# Altium PCB BSPD.PcbDoc
Units mil, origin at the board's own origin, x right, y up, seen from the top; angles counter-clockwise.
Board outline 3937.01 x 3149.61 mil, 2 copper layers (Top, Bottom); 40 components, 50 nets, 205 pads, 88 vias.
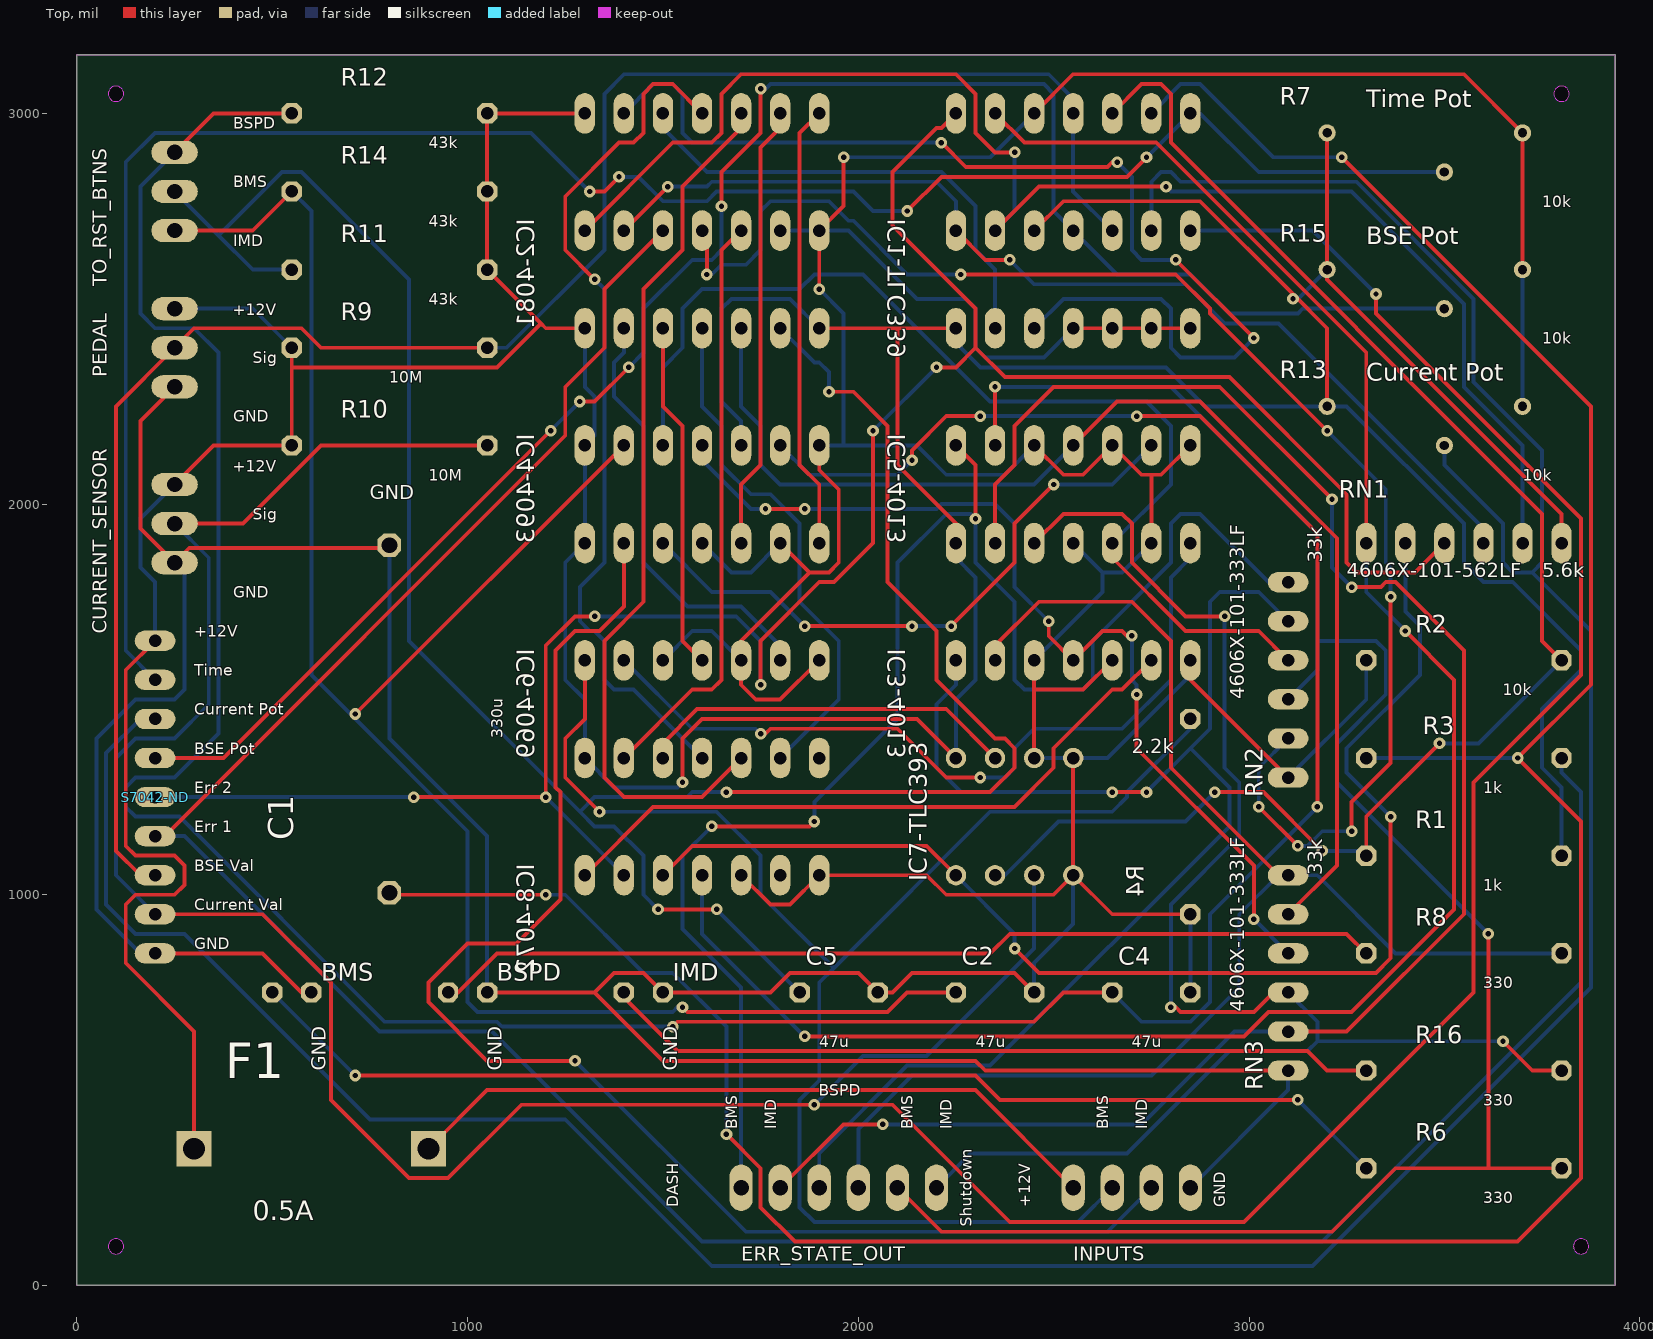
[diagram p0: Top view]
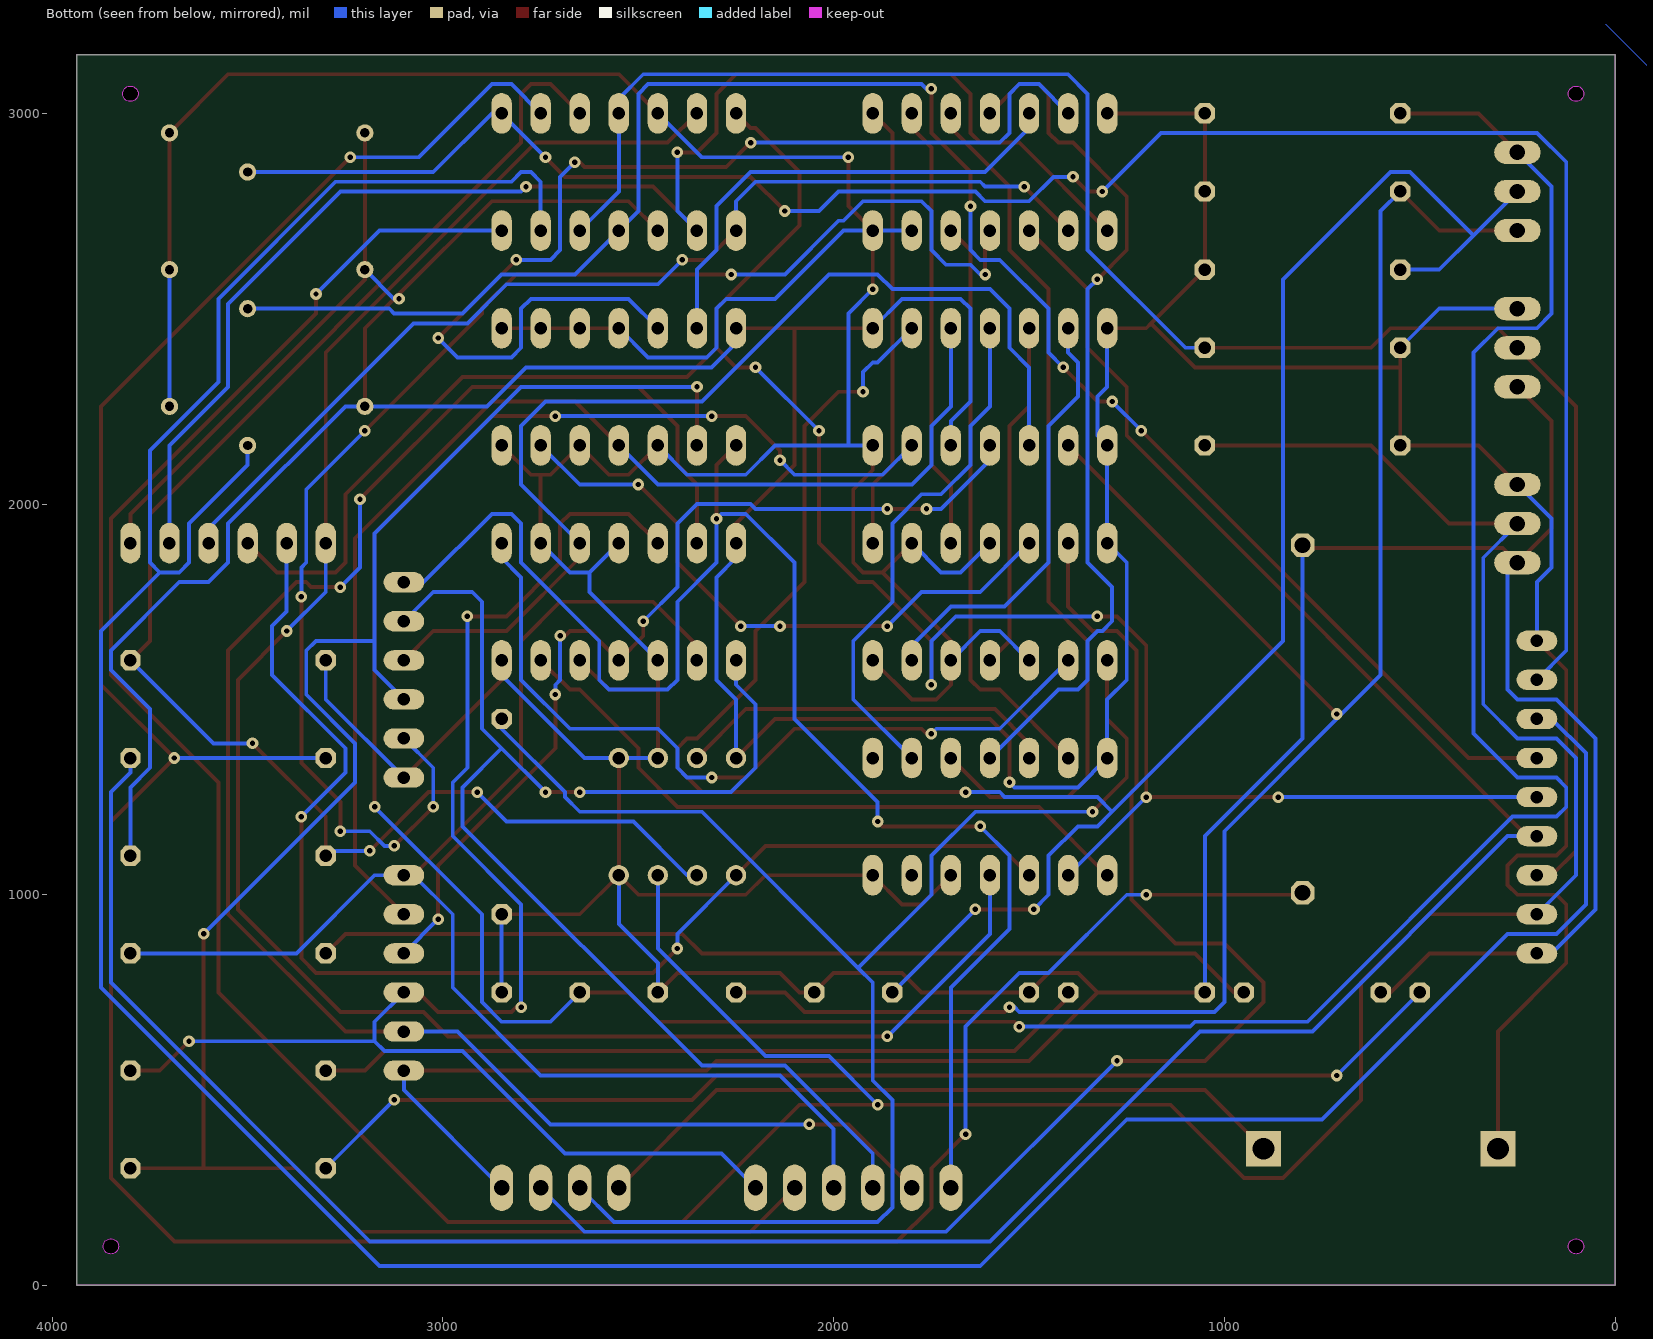
[diagram p1: Bottom view, seen from below]

## Layer stack, top to bottom
Top Solder: solder mask 0.4, Solder Resist, Dk 3.5
Top: signal copper 1.378
Dielectric 1: dielectric 12.6, FR-4, Dk 4.8
Bottom: signal copper 1.378
Bottom Solder: solder mask 0.4, Solder Resist, Dk 3.5

## Board outline
0,3149.61 0,0 3937.01,0 3937.01,3149.61
cut-out: 3850,80.31 ccw(c3850,100) 3869.68,100 ccw(c3850,100) 3850,119.69 ccw(c3850,100) 3830.32,100 ccw(c3850,100)
cut-out: 3800,3030.32 ccw(c3800,3050) 3819.68,3050 ccw(c3800,3050) 3800,3069.68 ccw(c3800,3050) 3780.32,3050 ccw(c3800,3050)
cut-out: 100,3030.32 ccw(c100,3050) 119.69,3050 ccw(c100,3050) 100,3069.68 ccw(c100,3050) 80.31,3050 ccw(c100,3050)
cut-out: 100,80.31 ccw(c100,100) 119.69,100 ccw(c100,100) 100,119.69 ccw(c100,100) 80.31,100 ccw(c100,100)

## Design rules (kind name [scope] priority, off if disabled: settings)
BoardOutlineClearance mdCopperDimension [All] p1: gap=10 ignorepadtopadclearanceinfootprint=FALSE except(0: Arc-SplitContinuation Track-SplitContinuation SMDPad-SplitContinuation THPad-SplitContinuation Via-SplitContinuation Fill-SplitContinuation Poly-SplitContinuation Region-SplitContinuation Text-SplitContinuation; 40: Poly-OutlineEdge Poly-CavityEdge Poly-CutoutEdge Poly-SplitBarrior)
Clearance "Clearance (Same Net)" [All] p1: gap=15 ignorepadtopadclearanceinfootprint=FALSE
Clearance [All] p2: gap=15 ignorepadtopadclearanceinfootprint=FALSE
HoleSize [All] p1: absolutevalues=TRUE maxlimit=100000 minlimit=13.78 maxpercent=80.000 minpercent=20.000
HoleToHoleClearance mdDrill [All] p1: gap=6 allowstackedmicrovias=TRUE
MinimumSolderMaskSliver [All] p1 off: minsoldermaskwidth=10
PasteMaskExpansion mlMinCreamFrame [All] p1: expansion=0
PolygonConnect PolygonConnect_For_PolygonThermal_ON_Width60000_Gap100000 [InPolygonClass('PolygonThermal_ON_Width60000_Gap100000') vs Not IsVia] p1: connectstyle=Relief reliefconductorwidth=6 reliefentries=4 polygonreliefangle="90 Angle" airgapwidth=10
PolygonConnect ThermalVias [IsVia] p2: connectstyle=Direct reliefconductorwidth=10 reliefentries=4 polygonreliefangle="90 Angle" airgapwidth=10
PolygonConnect [All] p3: connectstyle=Relief reliefconductorwidth=10 reliefentries=4 polygonreliefangle="90 Angle" airgapwidth=10
RoutingVias [All] p1: holewidth=13.78 width=29.78 viastyle="Through Hole" minholewidth=13.78 minwidth=29.78 maxholewidth=100 maxwidth=100
SolderMaskExpansion mlMinStopFrame [All] p1: expansion=4 istentingtop=FALSE
Width [All] p1: maxlimit=10 minlimit=10 preferedwidth=10
26 further rules are at their usual default settings.

## Classes and differential pairs
polygon class PolygonThermal_ON_Width60000_Gap100000: Polygon_1_Net_N$3 Polygon_1_Net_N$18

## Components (designator, comment, footprint, x,y, rotation, side; value= is the part's Value field where it differs from the comment)
BMS "LED3" LED3MM 550,750 r0 top
BSPD "LED2" LED3MM 1000,750 r0 top
C1 "330u" C225-108X268 800,1450 r90 top
C2 "47uF" C050-024X044 2350,750 r0 top
C4 "47uF" C050-024X044 2750,750 r0 top
C5 "47uF" C050-024X044 1950,750 r0 top
CURRENT_SENSOR "22-23-2031" 22-23-2031 250,1950 r270 top
ERR_STATE_OUT "22-23-2061" 22-23-2061 1950,250 r0 top
F1 "FUSEBLANK_5X20MM" FUSE_HOLDER_5X20MM 300,350 r0 top
IC1-TLC339 "TLC339P" DIL14 2550,2850 r0 top
IC2-4081 "4081N" DIL14 1600,2850 r0 top
IC3-4013 "4013N" DIL14 2550,1750 r0 top
IC4-4093 "4093N" DIL14 1600,2300 r0 top
IC5-4013 "4013N" DIL14 2550,2300 r0 top
IC6-4069 "4069N" DIL14 1600,1750 r0 top
IC7-TLC393 "TLC393P" DIL08 2400,1200 r0 top
IC8-4072 "4072N" DIL14 1600,1200 r0 top
IMD "LED4" LED3MM 1450,750 r0 top
INPUTS "22-23-2041" 22-23-2041 2700,250 r0 top
PEDAL "22-23-2031" 22-23-2031 250,2400 r270 top
R1 "1k" 0207/12 3550,1100 r0 top
R2 "10k" 0207/12 3550,1600 r0 top
R3 "1k" 0207/12 3550,1350 r180 top
R4 "2.2k" 0207/12 2850,1200 r90 top
R6 "330" 0207/12 3550,300 r0 top
R7 "10k" RTRIM3006P 3500,2900 r0 top
R8 "330" 0207/12 3550,850 r0 top
R9 "10M" 0207/12 800,2400 r0 top
R10 "10M" 0207/12 800,2150 r0 top
R11 "43k" 0207/12 800,2600 r0 top
R12 "43k" 0207/12 800,3000 r0 top
R13 "10k" RTRIM3006P 3500,2200 r0 top
R14 "43k" 0207/12 800,2800 r0 top
R15 "10k" RTRIM3006P 3500,2550 r0 top
R16 "330" 0207/12 3550,550 r0 top
RN1 "5.1k" SIL6 3550,1900 r180 top
RN2 "33k" SIL6 3100,1550 r90 top
RN3 "33k" SIL6 3100,800 r90 top
S7042-ND "" FE09W 200,1250 r90 top
TO_RST_BTNS "22-23-2031" 22-23-2031 250,2800 r270 top

## Footprints (in the part's own frame and the unit in brackets; to place one, negate y for a bottom-side part, rotate by r counter-clockwise, add the part's x,y. Pads: shape width x height; smd on the part's side, far side on the other; paste and mask are expansions set on the pad)
22-23-2031 [mm] "22-23-2031"
  oval 1.508x3.016 hole 1: 1(-2.54,0) 2(0,0) 3(2.54,0)
  body extent -3.3,-1.51 3.3,1.51, height 1.27
22-23-2041 [mm] "22-23-2041"
  oval 1.508x3.016 hole 1: 1(-3.81,0) 2(-1.27,0) 3(1.27,0) 4(3.81,0)
  body extent -4.57,-1.51 4.57,1.51, height 1.27
22-23-2061 [mm] "22-23-2061"
  oval 1.508x3.016 hole 1: 1(-6.35,0) 2(-3.81,0) 3(-1.27,0) 4(1.27,0) 5(3.81,0) 6(6.35,0)
  body extent -7.11,-1.51 7.11,1.51, height 1.27
0207/12 [mil] "0207/12"
  oct 52x52 / inner round 48.04 / far side oct 52x52 hole 32: 1(-250,0) 2(250,0)
  body extent -274,-24 274,24, height 150
C050-024X044 [mil] "C050-024X044"
  oct 52x52 / inner round 48.04 / far side oct 52x52 hole 32: 1(-100,0) 2(100,0)
  body extent -124,-28 124,28, height 150
C225-108X268 [mil] "C225-108X268"
  oct 60x60 / inner round 55.43 / far side oct 60x60 hole 40: 1(-445,0) 2(445,0)
  body extent -473,-28 473,28, height 50
DIL08 [mil] "DIL08"
  round 52 hole 32: 1(-150,-150) 2(-50,-150) 3(50,-150) 4(150,-150) 5(150,150) 6(50,150) 7(-50,150) 8(-150,150)
  body extent -176,-176 176,176, height 50
DIL14 [mil] "DIL14"
  oval 52x104 hole 32: 1(-300,-150) 2(-200,-150) 3(-100,-150) 4(0,-150) 5(100,-150) 6(200,-150) 7(300,-150) 8(300,150) 9(200,150) 10(100,150) 11(0,150) 12(-100,150) 13(-200,150) 14(-300,150)
  body extent -326,-202 326,202, height 50
FE09W [mil] "FE09W"
  oval 52x104 hole 32: 1(-400,0) 2(-300,0) 3(-200,0) 4(-100,0) 5(0,0) 6(100,0) 7(200,0) 8(300,0) 9(400,0)
  body extent -426,-52 426,52, height 150
FUSE_HOLDER_5X20MM [mil] "FUSE_HOLDER_5X20MM"
  rect 90x90 / inner round 83.15 / far side rect 90x90 hole 56: 1(0,0) 2(600,0)
  body extent -42,-42 642,42, height 50
LED3MM [mil] "LED3MM"
  oct 52x52 / inner round 48.04 / far side oct 52x52 hole 32: A(-50,0) K(50,0)
  body extent -85,-55 74,55, height 150
RTRIM3006P [mil] "RTRIM3006P"
  round 44 hole 24: 1(-300,50) 2(0,-50) 3(200,50)
  body extent -322,-72 222,72, height 50
SIL6 [mil] "SIL6"
  oval 52x104 hole 32: 1(-250,0) 2(-150,0) 3(-50,0) 4(50,0) 5(150,0) 6(250,0)
  body extent -283,-52 276,52, height 150

## Part data
BMS BSPD IMD: library part LED3MM, PackageName=LED3MM
C1: library part C225-108X268, PackageName=C225-108X268
C2 C4 C5: library part C050-024X044, PackageName=C050-024X044
F1: library part FUSE_HOLDER_5X20MM, PackageName=FUSE_HOLDER_5X20MM
IC1-TLC339 IC2-4081 IC3-4013 IC4-4093 IC5-4013 IC6-4069 IC8-4072: library part DIL14, PackageName=DIL14
IC7-TLC393: library part DIL08, PackageName=DIL08
R1 R2 R3 R4 R6 R8 R9 R10 R11 R12 R14 R16: library part 0207/12, PackageName=0207/12
R7 R13 R15: library part RTRIM3006P, PackageName=RTRIM3006P
RN1 RN2 RN3: library part SIL6, PackageName=SIL6
S7042-ND: library part FE09W, PackageName=FE09W
CURRENT_SENSOR PEDAL TO_RST_BTNS: PackageName=22-23-2031
ERR_STATE_OUT: PackageName=22-23-2061
INPUTS: PackageName=22-23-2041

## Free pads (board coordinates)
  round 39.37 hole 39.37 unplated: MH1(100,3050) MH2(100,100) MH3(3850,100) MH4(3800,3050)

## Via types
v1: diameter 29.78/29.78 (per signal layer), hole 13.78, Top to Bottom, 88 vias

## Nets (pads, with @x,y where several pads share a name; then routed paths per layer and width w, separated by ;. In a path a pad name is that pad's centre, name@x,y a point inside that pad or via, vN(x,y) a via of type N, cw(c..) or ccw(c..) an arc to the next point about the centre after c; other vN are vias at no path point)
+12V: CURRENT_SENSOR.1 F1.1 IC1-TLC339.3 IC2-4081.14 IC3-4013.14 IC4-4093.1 IC4-4093.5 IC4-4093.8 IC4-4093.14 IC5-4013.14 IC6-4069.14 IC7-TLC393.8 IC8-4072.14 PEDAL.1 R1.2 R7.1 R9.1 R10.1 R11.2 R12.2 R13.1 R14.2 R15.1 RN1.1 S7042-ND.9 | length 14369.2
  Top w10: S7042-ND.9 125,1575 125,1125 150,1100 250,1100 275,1075 275,1025 250,1000 150,1000 125,975 125,825 300,650 F1.1 ; CURRENT_SENSOR.1 350,2150 R10.1 550,2350 ; R9.1 550,2350 ; IC4-4093.14 1200,2450 1187.5,2462.5 ; IC2-4081.14 R12.2 R14.2 R11.2 1187.5,2462.5 ; v1(1550,1287.5) 1550,1400 1600,1450 2150,1450 IC7-TLC393.8 ; IC4-4093.8 2100,2450 ; IC3-4013.14 2250,1950 2100,2100 2100,2450 ; IC5-4013.14 2100,2450 ; IC1-TLC339.3 2525,2775 2875,2775 v1@3112.5,2537.5 ; v1(3112.5,2525) v1@3112.5,2537.5 ; R13.1 3200,2450 v1@3112.5,2537.5 ; R7.1 R15.1 3200,2575 3800,1975 RN1.1 ; 550,2350 1075,2350 1187.5,2462.5
  Bottom w10: S7042-ND.9 200,1800 162.5,1837.5 162.5,1962.5 CURRENT_SENSOR.1 ; PEDAL.1 450,2500 R9.1 ; IC4-4093.14 1300,2300 1325,2275 1325,2175 IC4-4093.1 IC6-4069.14 1250,1850 1250,1550 1300,1500 IC8-4072.14 1375,1275 1537.5,1275 v1(1550,1287.5) ; IC4-4093.5 1700,2212.5 1650,2262.5 1650,2500 1675,2525 1825,2525 IC4-4093.8 ; IC7-TLC393.8 2250,1500 2300,1550 2300,1812.5 2250,1862.5 IC3-4013.14 ; IC5-4013.14 2250,2412.5 2312.5,2350 2787.5,2350 2887.5,2250 R13.1 3250,2250 3550,1950 3550,1850 3600,1800 3675,1800 3850,1625 3850,1575 3750,1475 3750,1325 3800,1275 R1.2 ; v1(3112.5,2525) 3125,2525 R15.1
BMS: IC6-4069.13 INPUTS.3 | length 3642.2
  Top w10: v1(1275,575) 1050,575 900,725 900,775 1000,875 1125,875 1237.5,987.5 1237.5,1262.5 1225,1275 1225,1625 1275,1675 1337.5,1675 1400,1737.5 IC6-4069.13
  Bottom w10: v1(1275,575) 1712.5,137.5 2637.5,137.5 INPUTS.3
BMS_DASH: ERR_STATE_OUT.1 IC5-4013.1 RN2.6 | length 4041.9
  Top w10: v1(1625,1175) 1875,1175 v1(1887.5,1187.5) ; IC5-4013.1 2300,2100 v1(2300,1962.5)
  Bottom w10: v1(1625,1175) 1550,1100 1550,912.5 1700,762.5 ERR_STATE_OUT.1 ; v1(1887.5,1187.5) 1887.5,1237.5 2100,1450 2100,1850 2225,1975 2287.5,1975 v1(2300,1962.5) 2300,1850 2400,1750 2400,1550 2425,1525 2575,1525 2600,1550 2600,1650 2800,1850 2800,1950 2825,1975 2875,1975 3050,1800 RN2.6
BMS_ERR: ERR_STATE_OUT.5 IC5-4013.2 R6.2 RN2.3 | length 5122.9
  Top w10: ERR_STATE_OUT.5 2212.5,137.5 3212.5,137.5 3375,300 3612.5,300 ; IC5-4013.2 v1(2350,2300) ; v1(3612.5,900) 3612.5,300 ; R6.2 3612.5,300
  Bottom w10: v1(2350,2300) 2800,2300 3175,1925 3175,1650 ; RN2.3 3175,1575 3175,1650 ; v1(3612.5,900) 3225,1287.5 3225,1387.5 3350,1512.5 3350,1625 3325,1650 3175,1650
BMS_RST: IC4-4093.10 IC5-4013.4 RN3.5 | length 3113.7
  Top w10: IC5-4013.4 2662.5,2262.5 2875,2262.5 3225,1912.5 3225,1075 RN3.5
  Bottom w10: IC4-4093.10 1700,2250 1750,2200 1750,2100 1800,2050 2450,2050 IC5-4013.4
BSE: IC1-TLC339.5 IC1-TLC339.11 PEDAL.2 R9.2 S7042-ND.3 | length 4746
  Top w10: S7042-ND.3 162.5,1050 100,1112.5 100,2250 PEDAL.2 300,2450 575,2450 625,2400 R9.2
  Bottom w10: R9.2 1100,2400 1350,2650 1350,3050 1400,3100 2487.5,3100 2550,3037.5 IC1-TLC339.11 2550,2800 IC1-TLC339.5
BSE_POT: IC1-TLC339.4 R15.2 S7042-ND.6 | length 4687.7
  Top w10: S7042-ND.6 375,1350 v1(1212.5,2187.5) ; v1(1287.5,2262.5) 1325,2262.5 v1(1412.5,2350) ; v1(1650,2762.5) 1650,2850 1750,2950 v1(1750,3062.5)
  Bottom w10: v1(1212.5,2187.5) v1(1287.5,2262.5) ; v1(1412.5,2350) 1450,2387.5 1450,2500 1575,2625 1625,2625 1650,2650 v1(1650,2762.5) ; v1(1750,3062.5) 1762.5,3062.5 1775,3075 2475,3075 2500,3050 2500,2750 IC1-TLC339.4 2662.5,2587.5 2850,2587.5 2950,2487.5 3125,2487.5 3137.5,2500 R15.2
BSE_UNPLUGGED: IC1-TLC339.13 IC8-4072.4 RN1.6 | length 5040.3
  Top w10: v1(1862.5,637.5) 2987.5,637.5 3050,700 3262.5,700 3525,962.5 3525,1550 v1(3400,1675) ; IC1-TLC339.13 2425,2925 2762.5,2925 3300,2387.5 RN1.6
  Bottom w10: IC8-4072.4 1600,900 v1(1862.5,637.5) ; RN1.6 3300,1775 v1(3400,1675)
BSPD_DASH: ERR_STATE_OUT.3 IC3-4013.1 RN2.5 | length 3381.2
  Top w10: v1(2650,1262.5) v1(2737.5,1262.5)
  Bottom w10: ERR_STATE_OUT.3 1900,337.5 2125,562.5 2337.5,562.5 2950,1175 2950,1275 2850,1375 ; IC3-4013.1 2250,1537.5 2200,1487.5 2200,1325 2262.5,1262.5 v1(2650,1262.5) ; v1(2737.5,1262.5) 2850,1375 ; RN2.5 3025,1775 2925,1775 2900,1750 2900,1425 2850,1375
BSPD_ERR: ERR_STATE_OUT.4 IC3-4013.2 R8.2 RN3.6 | length 3726.3
  Top w10: IC3-4013.2 2350,1637.5 2462.5,1750 2700,1750 2800,1650 2800,1325 3075,1050 RN3.6
  Bottom w10: ERR_STATE_OUT.4 2000,400 2137.5,537.5 2750,537.5 2975,762.5 2975,950 3075,1050 RN3.6 3175,1050 3375,850 R8.2
BSPD_RST: IC3-4013.4 IC4-4093.4 RN3.4 | length 2491.7
  Top w10: v1(1762.5,1987.5) v1(1862.5,1987.5) ; v1(2487.5,1700) 2487.5,1662.5 IC3-4013.4 2625,1675 2675,1675 2687.5,1662.5 v1(2700,1662.5) ; v1(2712.5,1512.5) 2712.5,1375 3012.5,1075 v1(3012.5,937.5)
  Bottom w10: IC4-4093.4 1600,2112.5 1725,1987.5 v1(1762.5,1987.5) ; v1(1862.5,1987.5) 2200,1987.5 2212.5,2000 2350,2000 2400,1950 2400,1787.5 v1(2487.5,1700) ; v1(2700,1662.5) 2700,1550 2712.5,1537.5 v1(2712.5,1512.5) ; v1(3012.5,937.5) RN3.4
CURR_UNPLUGGED: IC7-TLC393.1 IC8-4072.3 RN1.5 | length 3268
  Top w10: IC8-4072.3 1575,1125 2175,1125 IC7-TLC393.1 ; v1(2400,862.5) 2462.5,800 3325,800 3362.5,837.5 v1(3362.5,1200)
  Bottom w10: IC7-TLC393.1 2400,900 v1(2400,862.5) ; v1(3362.5,1200) 3250,1312.5 3250,1375 3437.5,1562.5 3437.5,1687.5 3400,1725 RN1.5
CURRENT_POT: IC1-TLC339.6 R13.2 S7042-ND.7 | length 8477
  Bottom w10: S7042-ND.7 162.5,1450 75,1362.5 75,975 150,900 275,900 750,425 1250,425 1625,50 3162.5,50 3875,762.5 3875,1675 3725,1825 ; IC1-TLC339.6 2750,2825 2775,2850 2800,2850 2825,2825 3275,2825 3575,2525 3575,2312.5 3750,2137.5 3750,1850 3725,1825 ; R13.2 3500,2100 3650,1950 3650,1850 3675,1825 3725,1825
CURRENT_SENSOR: CURRENT_SENSOR.2 IC1-TLC339.7 IC7-TLC393.3 R10.2 S7042-ND.2 | length 9969.9
  Top w10: S7042-ND.2 475,950 650,775 650,475 850,275 950,275 1137.5,462.5 v1(1887.5,462.5) 2087.5,462.5 2387.5,162.5 2987.5,162.5 3575,750 3575,1287.5 3850,1562.5 3850,1962.5 3325,2487.5 v1(3325,2537.5) ; CURRENT_SENSOR.2 425,1950 625,2150 R10.2
  Bottom w10: S7042-ND.2 100,1050 100,1350 150,1400 250,1400 337.5,1487.5 337.5,1862.5 CURRENT_SENSOR.2 ; v1(1887.5,462.5) 2012.5,587.5 2175,587.5 2450,862.5 IC7-TLC393.3 ; IC1-TLC339.7 3162.5,2700 v1(3325,2537.5)
ERROR_1: IC2-4081.3 R3.1 S7042-ND.4 | length 7053
  Top w10: S7042-ND.4 225,1150 1250,2175 1250,2300 1350,2400 1350,2550 IC2-4081.3
  Bottom w10: S7042-ND.4 275,1150 775,650 1062.5,650 1600,112.5 3187.5,112.5 3850,775 3850,1262.5 3800,1312.5 R3.1
ERROR_2: IC1-TLC339.14 IC8-4072.2 RN1.4 S7042-ND.5 | length 5865.8
  Top w10: v1(862.5,1250) v1(1200,1250) 1200,1637.5 1275,1712.5 v1(1325,1712.5) ; v1(1750,1537.5) 1750,1650 1900,1800 1937.5,1800 2037.5,1900 v1(2037.5,2187.5) ; v1(2200,2350) 2250,2350 2300,2400 ; IC1-TLC339.14 2212.5,2962.5 2200,2962.5 2087.5,2850 2087.5,2712.5 2300,2500 2300,2400 ; RN1.4 3425,1825 3275,1825 3250,1850 3250,2025 2950,2325 2375,2325 2300,2400
  Bottom w10: S7042-ND.5 v1(862.5,1250) ; v1(1200,1250) IC8-4072.2 ; v1(1325,1712.5) 1687.5,1712.5 1750,1650 v1(1750,1537.5) ; v1(2037.5,2187.5) v1(2200,2350)
ERROR_3: IC3-4013.6 IC8-4072.1 | length 1707.1
  Top w10: IC8-4072.1 1475,1225 2400,1225 2500,1325 2500,1375 2650,1525 2675,1525 IC3-4013.6
ESO_BMS_RST: C5.1 IC4-4093.9 R11.1 TO_RST_BTNS.2 | length 5999.1
  Top w10: v1(1487.5,962.5) v1(1637.5,962.5) ; v1(1662.5,1262.5) 2337.5,1262.5 2400,1325 2400,1375 2375,1400 2350,1400 2200,1550 2200,1675 2075,1800 2075,2200 1987.5,2287.5 v1(1925,2287.5)
  Bottom w10: TO_RST_BTNS.2 362.5,2687.5 ; R11.1 450,2600 362.5,2687.5 ; v1(1487.5,962.5) 1450,1000 1450,1100 1375,1175 1325,1175 1287.5,1212.5 ; v1(1637.5,962.5) C5.1 ; v1(1662.5,1262.5) 1575,1262.5 1562.5,1250 1325,1250 1287.5,1212.5 ; IC4-4093.9 1887.5,2362.5 1900,2362.5 1925,2337.5 v1(1925,2287.5) ; 362.5,2687.5 525,2850 575,2850 850,2575 850,1650 1287.5,1212.5
ESO_BSPD_RST: C4.1 IC4-4093.6 R12.1 TO_RST_BTNS.1 | length 8368.1
  Top w10: TO_RST_BTNS.1 350,3000 R12.1 ; v1(1525,662.5) 1537.5,675 2450,675 2525,750 C4.1 ; v1(2137.5,2112.5) 2137.5,2137.5 2225,2225 v1(2312.5,2225) ; v1(2712.5,2225) 2875,2225 3175,1925 v1(3175,1225)
  Bottom w10: TO_RST_BTNS.1 162.5,2812.5 162.5,2487.5 200,2450 300,2450 362.5,2387.5 362.5,1412.5 250,1300 150,1300 125,1275 125,1225 150,1200 262.5,1200 787.5,675 1075,675 1087.5,662.5 v1(1525,662.5) ; IC4-4093.6 1875,2075 2100,2075 v1(2137.5,2112.5) ; v1(2312.5,2225) v1(2712.5,2225) ; C4.1 2725,675 2850,675 2900,725 2900,950 v1(3175,1225)
ESO_IMD_RST: C2.1 IC4-4093.2 R14.1 TO_RST_BTNS.3 | length 4879
  Top w10: TO_RST_BTNS.3 450,2700 R14.1 ; v1(712.5,1462.5) IC4-4093.2 ; v1(1550,712.5) 1562.5,700 2075,700 2125,750 C2.1
  Bottom w10: R14.1 600,2750 600,1562.5 v1@700,1462.5 ; v1(712.5,1462.5) v1@700,1462.5 ; v1(1550,712.5) 1537.5,712.5 1525,700 1025,700 1000,725 1000,1162.5 v1@700,1462.5
GND: BMS.K BSPD.K C1.2 C2.2 C4.2 C5.2 CURRENT_SENSOR.3 IC1-TLC339.12 IC2-4081.6 IC2-4081.7 IC3-4013.3 IC3-4013.5 IC3-4013.7 IC3-4013.9 IC3-4013.11 IC4-4093.7 IC5-4013.3 IC5-4013.5 IC5-4013.7 IC5-4013.8 IC5-4013.9 IC5-4013.10 IC5-4013.11 IC6-4069.3 IC6-4069.5 IC6-4069.7 IC6-4069.9 IC6-4069.11 IC7-TLC393.4 IC7-TLC393.5 IC7-TLC393.6 IC8-4072.5 IC8-4072.7 IMD.K INPUTS.4 PEDAL.3 R2.1 R4.1 R7.3 R13.3 R15.3 RN2.1 RN3.1 S7042-ND.1 | length 19922.3
  Top w10: S7042-ND.1 475,850 575,750 BMS.K ; PEDAL.3 162.5,2212.5 162.5,1937.5 CURRENT_SENSOR.3 287.5,1887.5 800,1887.5 C1.2 ; BSPD.K 1325,750 ; IC8-4072.5 1775,975 1825,975 IC8-4072.7 2175,1050 2225,1000 2500,1000 IC7-TLC393.4 ; IC6-4069.9 1875,1825 ; IC6-4069.7 1800,1500 1737.5,1500 1700,1537.5 IC6-4069.5 1700,1650 1875,1825 ; IC4-4093.7 1900,2087.5 1950,2037.5 1950,1850 1925,1825 1875,1825 ; v1(1900,2550) IC2-4081.7 1962.5,2762.5 v1(1962.5,2887.5) ; C2.2 2400,800 2137.5,800 2087.5,750 C5.2 2000,800 1825,800 1775,750 IMD.K 1450,800 1375,800 1325,750 ; IC7-TLC393.6 2450,1525 ; IC3-4013.3 2450,1525 ; IC5-4013.3 2525,2075 2575,2075 IC5-4013.5 2725,2075 2750,2075 ; IC1-TLC339.12 2550,3100 3550,3100 R7.3 R15.3 ; IC7-TLC393.5 IC7-TLC393.4 ; IC5-4013.11 IC5-4013.10 IC5-4013.9 IC5-4013.8 ; IC3-4013.5 2575,1525 2450,1525 ; IC3-4013.9 2750,2075 ; R4.1 2650,950 IC7-TLC393.4 ; IC3-4013.7 2850,1550 RN2.1 ; IC5-4013.7 2775,2075 2750,2075 ; RN3.1 2325,550 2300,575 1500,575 1325,750
  Bottom w10: S7042-ND.1 162.5,850 50,962.5 50,1400 150,1500 250,1500 275,1525 275,1825 CURRENT_SENSOR.3 ; C1.2 800,1400 1050,1150 BSPD.K ; IC6-4069.3 1575,1675 1625,1675 IC6-4069.5 ; IC6-4069.11 1675,1825 1725,1825 IC6-4069.9 ; IC2-4081.6 IC2-4081.7 1975,2700 2150,2525 2275,2525 2300,2500 2300,2400 2325,2375 2475,2375 IC5-4013.11 ; IC4-4093.7 1962.5,2150 ; v1(1900,2550) 1962.5,2487.5 1962.5,2150 ; v1(1962.5,2887.5) 2337.5,2887.5 IC1-TLC339.12 ; C2.2 2450,825 2550,925 IC7-TLC393.4 ; IC7-TLC393.6 IC7-TLC393.5 2637.5,1350 2850,1562.5 IC3-4013.7 ; IC3-4013.3 2625,1775 2625,1825 ; IC5-4013.3 2375,2075 2225,2075 2150,2150 1962.5,2150 ; IC3-4013.11 2625,1825 ; IC3-4013.9 2675,1825 2625,1825 ; INPUTS.4 3100,500 RN3.1 ; C4.2 R4.1 ; RN2.1 3300,1500 R2.1 ; R13.3 R15.3
IMD: IC6-4069.1 INPUTS.2 R4.2 | length 3967.8
  Top w10: IC6-4069.1 1300,1450 1250,1400 1250,1300 v1(1337.5,1212.5)
  Bottom w10: v1(1337.5,1212.5) 1637.5,1212.5 1750,1100 1750,1000 1937.5,812.5 ; INPUTS.2 2562.5,162.5 1887.5,162.5 1850,200 1850,475 1900,525 1900,775 1937.5,812.5 ; R4.2 2850,1425 2687.5,1262.5 2687.5,1250 2650,1212.5 2337.5,1212.5 1937.5,812.5
IMD_DASH: ERR_STATE_OUT.2 IC3-4013.13 RN3.2 | length 4619.5
  Top w10: ERR_STATE_OUT.2 1962.5,412.5 v1(2062.5,412.5) ; IC3-4013.13 2350,2050 2400,2100 2400,2200 2500,2300 2925,2300 v1(3212.5,2012.5) ; RN3.2 3250,650 3550,950 3550,1625 3375,1800 3350,1800 3337.5,1787.5 v1(3262.5,1787.5)
  Bottom w10: v1(2062.5,412.5) 2725,412.5 2962.5,650 RN3.2 ; v1(3212.5,2012.5) 3212.5,1837.5 v1(3262.5,1787.5)
IMD_ERR: ERR_STATE_OUT.6 IC3-4013.12 R16.2 RN3.3 | length 4042.2
  Top w10: IC3-4013.12 2525,1975 2675,1975 2700,1950 2700,1850 2837.5,1712.5 v1(2937.5,1712.5) ; v1(2800,712.5) 2812.5,712.5 2825,700 3012.5,700 3062.5,750 RN3.3 ; v1(3650,625) 3725,550 R16.2
  Bottom w10: ERR_STATE_OUT.6 2287.5,337.5 2687.5,337.5 2950,600 3150,600 3175,625 ; v1(2800,712.5) 2800,975 2975,1150 2975,1287.5 2937.5,1325 v1(2937.5,1712.5) ; RN3.3 3175,675 3175,625 ; v1(3650,625) 3175,625
IMD_RST: IC3-4013.10 IC4-4093.3 RN2.4 | length 2775.8
  Top w10: IC3-4013.10 2650,1862.5 2837.5,1675 3025,1675 RN2.4
  Bottom w10: IC4-4093.3 1500,2350 1550,2400 1550,2500 1600,2550 1850,2550 1887.5,2587.5 2012.5,2587.5 2337.5,2262.5 2737.5,2262.5 2800,2200 2800,2050 IC3-4013.10
N$1: IC1-TLC339.2 IC2-4081.1 RN1.2 | length 3731.9
  Top w10: IC2-4081.1 1525,2925 1625,2925 1650,2950 1650,3050 1700,3100 2250,3100 2300,3050 2300,2950 2350,2900 v1(2400,2900) ; IC1-TLC339.2 2462.5,2812.5 v1(2787.5,2812.5)
  Bottom w10: IC1-TLC339.2 2400,2750 v1(2400,2900) ; v1(2787.5,2812.5) 2800,2800 3262.5,2800 3550,2512.5 3550,2300 3700,2150 RN1.2
N$2: IC1-TLC339.1 IC2-4081.2 RN1.3 | length 2700.8
  Top w10: IC2-4081.2 v1(1512.5,2812.5) ; IC1-TLC339.1 2325,2625 v1(2387.5,2625)
  Bottom w10: v1(1512.5,2812.5) 1612.5,2812.5 1625,2825 2200,2825 2250,2775 IC1-TLC339.1 ; v1(2387.5,2625) 2450,2562.5 2837.5,2562.5 2937.5,2462.5 3075,2462.5 3600,1937.5 RN1.3
N$3: 
N$4: F1.2 INPUTS.1 | length 1815.7
  Top w10: F1.2 1050,500 2300,500 INPUTS.1
N$5: IC3-4013.8 IC6-4069.2 | length 2038.2
  Top w10: v1(1750,1412.5) 1762.5,1412.5 1775,1425 2100,1425 2225,1300 v1(2312.5,1300)
  Bottom w10: IC6-4069.2 1575,1425 1737.5,1425 v1(1750,1412.5) ; v1(2312.5,1300) 2375,1300 2400,1325 2400,1375 2450,1425 2675,1425 2800,1550 2800,1812.5 2850,1862.5 IC3-4013.8
N$6: C1.1 IC1-TLC339.9 R3.2 | length 7714.9
  Top w10: C1.1 800,1000 v1(1200,1000) ; v1(1662.5,387.5) 1750,300 1750,200 1837.5,112.5 3687.5,112.5 3850,275 3850,1187.5 v1(3687.5,1350) 3875,1537.5 3875,2250 v1(3237.5,2887.5)
  Bottom w10: v1(1200,1000) 1250,1000 1450,800 1525,800 1662.5,662.5 v1(1662.5,387.5) ; IC1-TLC339.9 2825,3075 2875,3075 3062.5,2887.5 v1(3237.5,2887.5) ; R3.2 v1(3687.5,1350)
N$7: IC7-TLC393.7 IC8-4072.12 | length 975.5
  Top w10: IC8-4072.12 1500,1387.5 1587.5,1475 2225,1475 IC7-TLC393.7
N$8: IC4-4093.11 IC8-4072.9 | length 1336.4
  Bottom w10: IC4-4093.11 1600,2250 1650,2200 1650,2100 1725,2025 1775,2025 1850,1950 1850,1750 1950,1650 1950,1500 IC8-4072.9
N$9: BMS.A R6.1 | length 2986.4
  Top w10: v1(712.5,537.5) 2300,537.5 2362.5,475 v1(3125,475)
  Bottom w10: BMS.A v1(712.5,537.5) ; v1(3125,475) R6.1
N$10: IC4-4093.12 IC6-4069.4 | length 891.4
  Top w10: IC4-4093.12 1500,2250 1550,2200 1550,1650 IC6-4069.4
N$11: IC2-4081.10 IC8-4072.10 | length 2257.1
  Top w10: IC8-4072.10 1600,1250 1400,1250 1350,1300 1350,1650 1450,1750 1450,2550 1550,2650 1550,2812.5 1700,2962.5 IC2-4081.10
N$12: IC2-4081.11 IC8-4072.11 | length 2229.6
  Top w10: v1(1325,2575) 1250,2650 1250,2787.5 1387.5,2925 1425,2925 1450,2950 1450,3050 1475,3075 1525,3075 IC2-4081.11
  Bottom w10: v1(1325,2575) 1350,2550 1350,1850 1287.5,1787.5 1287.5,1700 1312.5,1675 1325,1675 1350,1650 1350,1550 1375,1525 1425,1525 IC8-4072.11
N$13: IC4-4093.13 IC6-4069.6 | length 1116.9
  Bottom w10: IC4-4093.13 1400,2387.5 1375,2362.5 1375,2275 1450,2200 1450,1850 1562.5,1737.5 1700,1737.5 1800,1637.5 IC6-4069.6
N$14: IC5-4013.6 IC6-4069.12 | length 1588.2
  Top w10: v1(1862.5,1687.5) v1(2137.5,1687.5) ; v1(2237.5,1687.5) 2400,1850 2400,1950 v1(2500,2050)
  Bottom w10: IC6-4069.12 1625,1775 1775,1775 v1(1862.5,1687.5) ; v1(2137.5,1687.5) v1(2237.5,1687.5) ; v1(2500,2050) 2650,2050 IC5-4013.6
N$15: IMD.A R16.1 | length 1990.2
  Top w10: IMD.A 1400,737.5 1537.5,600 3150,600 3200,550 R16.1
N$16: IC2-4081.9 IC6-4069.10 | length 1141.4
  Top w10: IC6-4069.10 1700,2050 1750,2100 1750,2912.5 1800,2962.5 IC2-4081.9
N$17: IC2-4081.8 IC6-4069.8 | length 1141.4
  Top w10: IC6-4069.8 1900,2050 1850,2100 1850,2950 IC2-4081.8
N$18: 
N$19: IC2-4081.5 IC8-4072.13 | length 1503.6
  Top w10: IC8-4072.13 1575,1525 1625,1525 1650,1550 1650,2650 IC2-4081.5
N$21: BSPD.A R8.1 | length 2432.8
  Top w10: BSPD.A 975,750 1075,850 2337.5,850 2387.5,900 3250,900 R8.1
N$22: IC2-4081.12 IC5-4013.13 | length 1253.6
  Bottom w10: IC2-4081.12 1500,2962.5 1612.5,2850 2212.5,2850 2300,2762.5 2300,2650 2350,2600 IC5-4013.13
N$23: IC2-4081.13 IC5-4013.12 | length 2826.6
  Top w10: v1(2212.5,2925) 2275,2862.5 2637.5,2862.5 2650,2875 v1(2662.5,2875) ; v1(2812.5,2625) v1(3012.5,2425)
  Bottom w10: IC2-4081.13 1475,3075 1525,3075 1550,3050 1550,2950 1575,2925 v1(2212.5,2925) ; IC5-4013.12 2525,2525 2775,2525 2800,2500 2800,2400 2825,2375 2962.5,2375 v1(3012.5,2425) ; v1(2662.5,2875) 2700,2837.5 2700,2650 2725,2625 v1(2812.5,2625)
N$24: IC2-4081.4 RN2.2 | length 3726.3
  Top w10: IC2-4081.4 1612.5,2687.5 v1(1612.5,2587.5) ; v1(2262.5,2587.5) 2812.5,2587.5 2900,2500 2900,2487.5 v1(3200,2187.5) ; v1(3025,1225) v1(3125,1125) ; v1(3262.5,1162.5) 3262.5,1237.5 3362.5,1337.5 v1(3362.5,1762.5)
  Bottom w10: v1(1612.5,2587.5) 1625,2587.5 1650,2612.5 1712.5,2612.5 1750,2650 1750,2750 1775,2775 1925,2775 1975,2725 1987.5,2725 2125,2587.5 v1(2262.5,2587.5) ; v1(3025,1225) 3025,1325 RN2.2 ; v1(3125,1125) 3150,1125 3187.5,1162.5 v1(3262.5,1162.5) ; v1(3200,2187.5) 3350,2037.5 3350,1850 3362.5,1837.5 v1(3362.5,1762.5)
TIMED_POT: IC1-TLC339.8 R7.2 S7042-ND.8 | length 5062.4
  Top w10: v1(1312.5,2800) 1350,2800 v1(1387.5,2837.5) ; v1(2125,2750) 2212.5,2837.5 2687.5,2837.5 v1(2737.5,2887.5)
  Bottom w10: S7042-ND.8 125,1625 125,2875 200,2950 1162.5,2950 v1(1312.5,2800) ; v1(1387.5,2837.5) 1437.5,2837.5 1500,2775 1612.5,2775 1637.5,2800 1987.5,2800 2037.5,2750 v1(2125,2750) ; v1(2737.5,2887.5) IC1-TLC339.8 2875,3000 3025,2850 R7.2
UNPLUG: IC1-TLC339.10 IC7-TLC393.2 R1.1 R2.2 | length 3926.7
  Top w10: IC1-TLC339.10 2725,3075 2775,3075 2800,3050 2800,2925 3750,1975 3750,1650 R2.2 ; v1(2912.5,1262.5) 3037.5,1262.5 v1(3187.5,1112.5) ; R1.1 3300,1200 v1(3487.5,1387.5)
  Bottom w10: IC7-TLC393.2 2375,1050 2512.5,1187.5 2837.5,1187.5 v1(2912.5,1262.5) ; v1(3187.5,1112.5) 3287.5,1112.5 R1.1 ; v1(3487.5,1387.5) 3587.5,1387.5 R2.2
pads on no net: IC8-4072.6 IC8-4072.8

## Polygon pours and split planes (outlines as drawn)
N$3 on Top "Polygon_1_Net_N$3" (solid, remove dead copper, pour order 0): -153,3253 -153,-51.24 -51.24,-153 3951.24,-153 4153,48.76 4153,3253
N$18 on Bottom "Polygon_1_Net_N$18" (solid, remove dead copper, pour order 1): -2.12,3202.12 -253,2951.24 -253,-1.24 -151.24,-103 4103,-103 4103,3201.24 4001.24,3303 98.76,3303

## Keep-outs
Keep-Out Layer:
  the board outline again, w0

## Silkscreen, mask and mechanical layers (free items; w line width, h text height)
Top Overlay:
  text "Time Pot" at 3300,3000 h77.5
  text "BSPD" at 400,2950 h49.6
  text "43k" at 900,2900 h49.6
  text "BMS" at 400,2800 h49.6
  text "10k" at 3750,2750 h49.6
  text "43k" at 900,2700 h49.6
  text "IMD" at 400,2650 h49.6
  text "BSE Pot" at 3300,2650 h77.5
  text "43k" at 900,2500 h49.6
  text "+12V" at 398.53,2472.58 h49.6
  text "10k" at 3750,2400 h49.6
  text "Sig" at 450,2350 h49.6
  text "10M" at 800,2300 h49.6
  text "Current Pot" at 3300,2300 h77.5
  text "GND" at 400,2200 h49.6
  text "+12V" at 398.53,2072.58 h49.6
  text "10M" at 900,2050 h49.6
  text "10k" at 3700,2050 h49.6
  text "GND" at 750,2000 h62
  text "Sig" at 450,1950 h49.6
  text "33k" at 3200,1850 h62 r90
  text "4606X-101-562LF" at 3250,1800 h62
  text "5.6k" at 3750,1800 h62
  text "GND" at 400,1750 h49.6
  text "+12V" at 300,1650 h49.6
  text "Time" at 300,1550 h49.6
  text "4606X-101-333LF" at 3000,1500 h62 r90
  text "10k" at 3650,1500 h49.6
  text "Current Pot" at 300,1450 h49.6
  text "330u" at 1100,1400 h49.6 r90
  text "BSE Pot" at 300,1350 h49.6
  text "2.2k" at 2700,1350 h62
  text "Err 2" at 300,1250 h49.6
  text "1k" at 3600,1250 h49.6
  text "Err 1" at 300,1150 h49.6
  text "BSE Val" at 300,1050 h49.6
  text "33k" at 3200,1050 h62 r90
  text "1k" at 3600,1000 h49.6
  text "Current Val" at 300,950 h49.6
  text "GND" at 300,850 h49.6
  text "330" at 3600,750 h49.6
  text "4606X-101-333LF" at 3000,700 h62 r90
  text "47u" at 1900,600 h49.6
  text "47u" at 2300,600 h49.6
  text "47u" at 2700,600 h49.6
  text "GND" at 650,550 h62 r90
  text "GND" at 1100,550 h62 r90
  text "GND" at 1550,550 h62 r90
  text "BSPD" at 1898.65,475.14 h49.6
  text "330" at 3600,450 h49.6
  text "BMS" at 1700,400 h49.6 r90
  text "IMD" at 1800,400 h49.6 r90
  text "BMS" at 2150,400 h49.6 r90
  text "IMD" at 2250,400 h49.6 r90
  text "BMS" at 2650,400 h49.6 r90
  text "IMD" at 2750,400 h49.6 r90
  text "DASH" at 1550,200 h49.6 r90
  text "+12V" at 2450,200 h49.6 r90
  text "GND" at 2950,200 h49.6 r90
  text "330" at 3600,200 h49.6
  text "0.5A" at 450,150 h86.8
  text "Shutdown" at 2300,150 h49.6 r90
Dimension:
  the board outline again, w0
Measures:
  lines w6: 100,100 3850,100 3850,3050 100,3050 100,100

## Dimensions
100,100 to 3850,100 on tFinish
100,3050 to 100,100 on tFinish
-650,3050 to -650,100 on tFinish
100,-350 to 3850,-350 on tFinish

## Text inside footprints (layer, text, board x,y; h text height)
RN1: tPlace "1" at 3890,1920 h60.45 r180
RN2: tPlace "1" at 3120,1210 h60.45 r90
RN3: tPlace "1" at 3120,460 h60.45 r90
S7042-ND: tPlace "8" at 100,1575 h77.5 r180; tPlace "7" at 100,1475 h77.5 r180; tPlace "6" at 100,1375 h77.5 r180; tPlace "4" at 100,1175 h77.5 r180; tPlace "3" at 100,1075 h77.5 r180; tPlace "5" at 100,1275 h77.5 r180; tPlace "9" at 100,1675 h77.5 r180; tPlace "2" at 100,975 h77.5 r180